# Altium PCB DragonFly.PcbDoc (part 1 of 2)
Units mil, origin at the board's own origin, x right, y up, seen from the top; angles counter-clockwise.
Board outline 2810.81 x 2810.8 mil, 4 copper layers (Top Layer, Mid-Layer 1, Mid-Layer 2, Bottom Layer); 100 components, 58 nets, 317 pads, 146 vias.
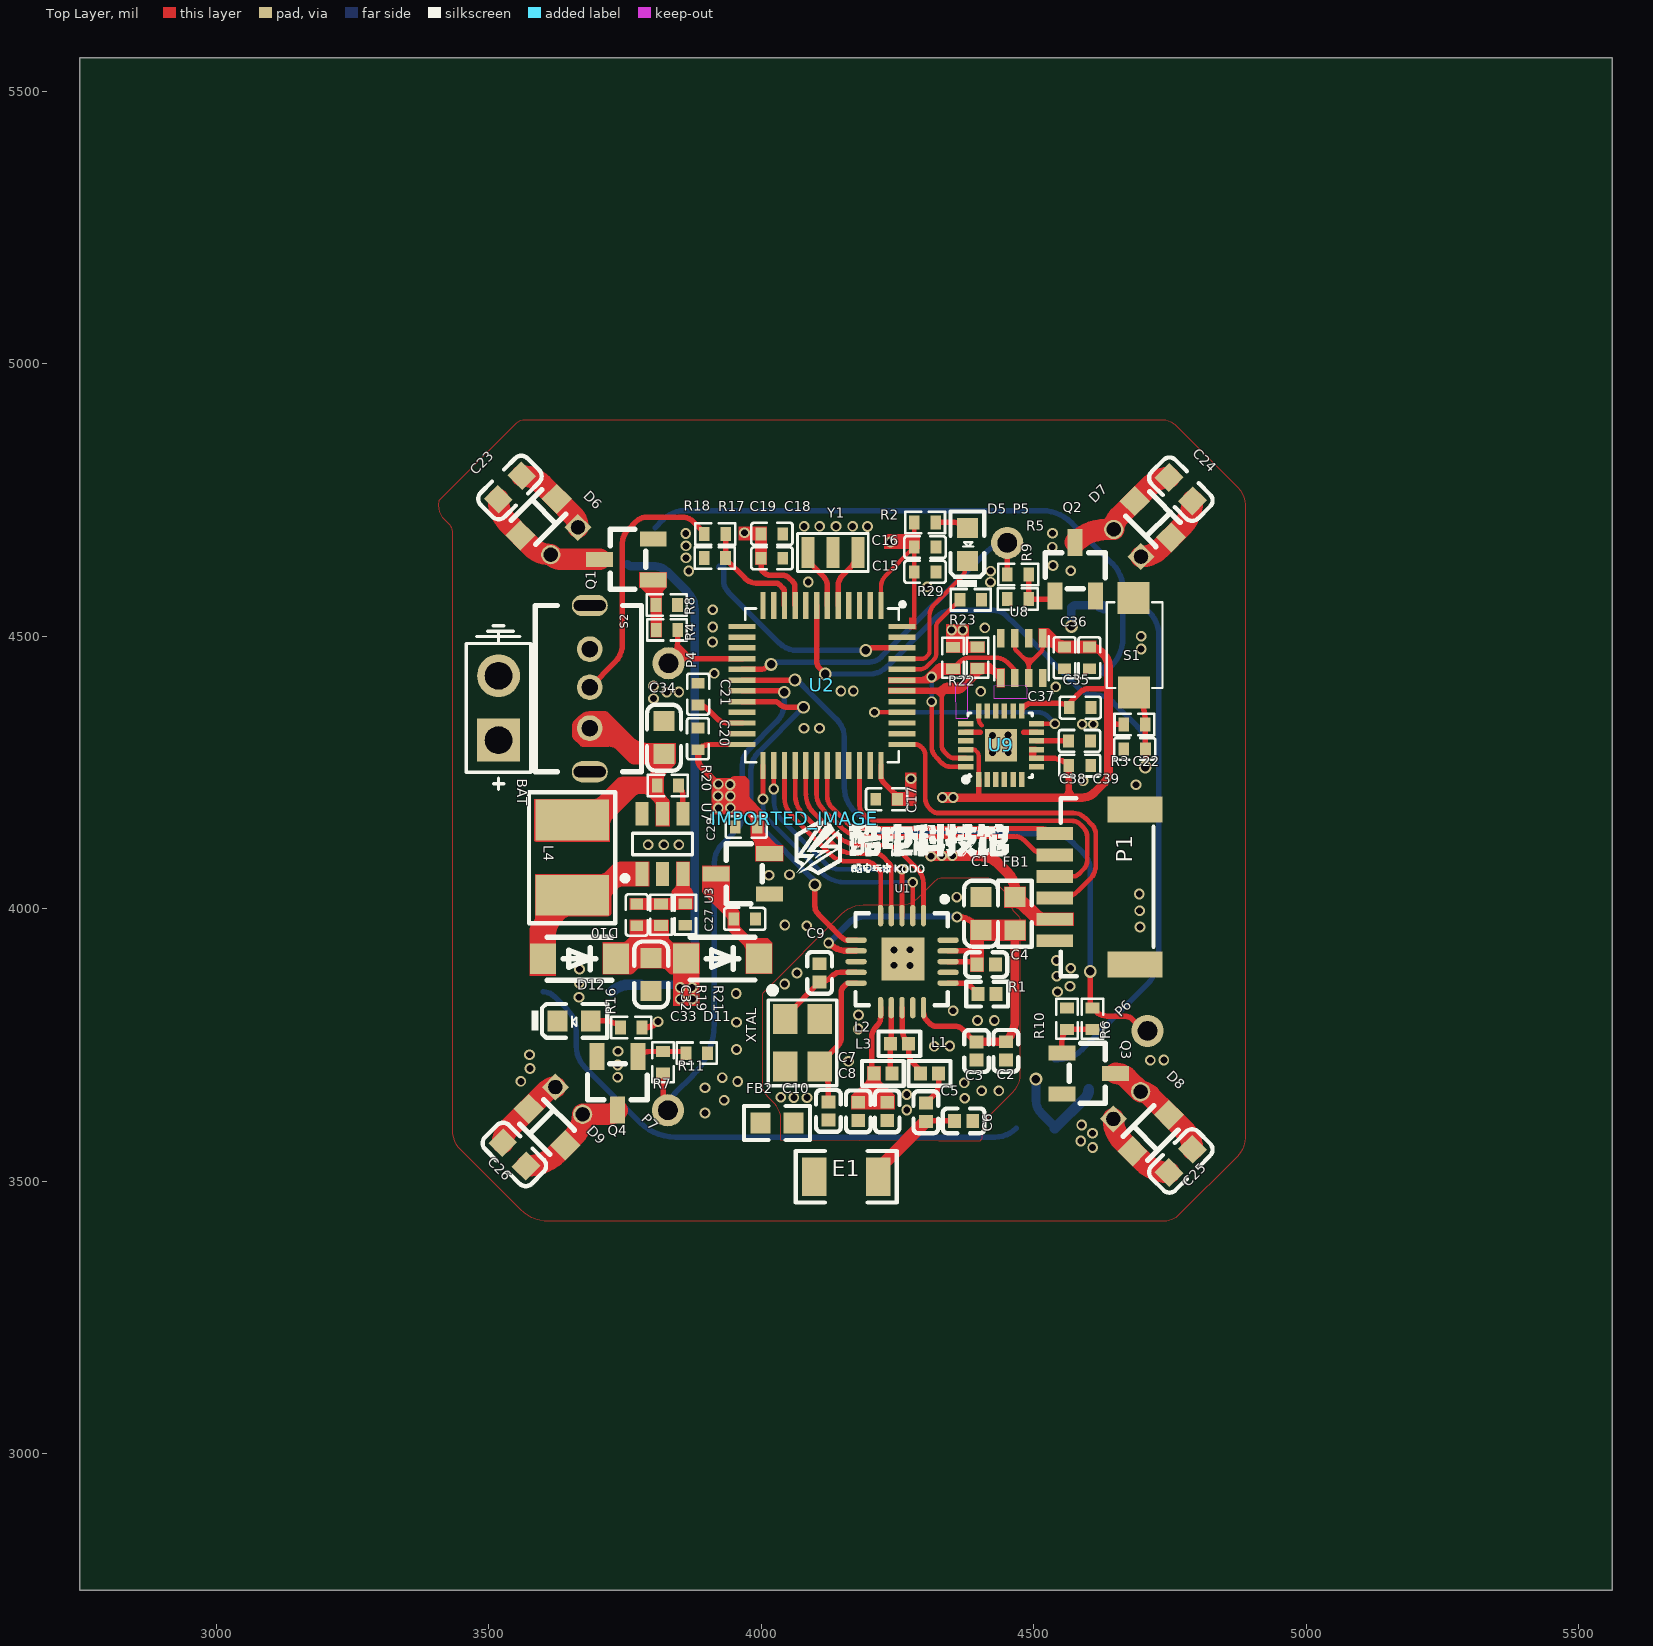
[diagram p0: Top Layer view]
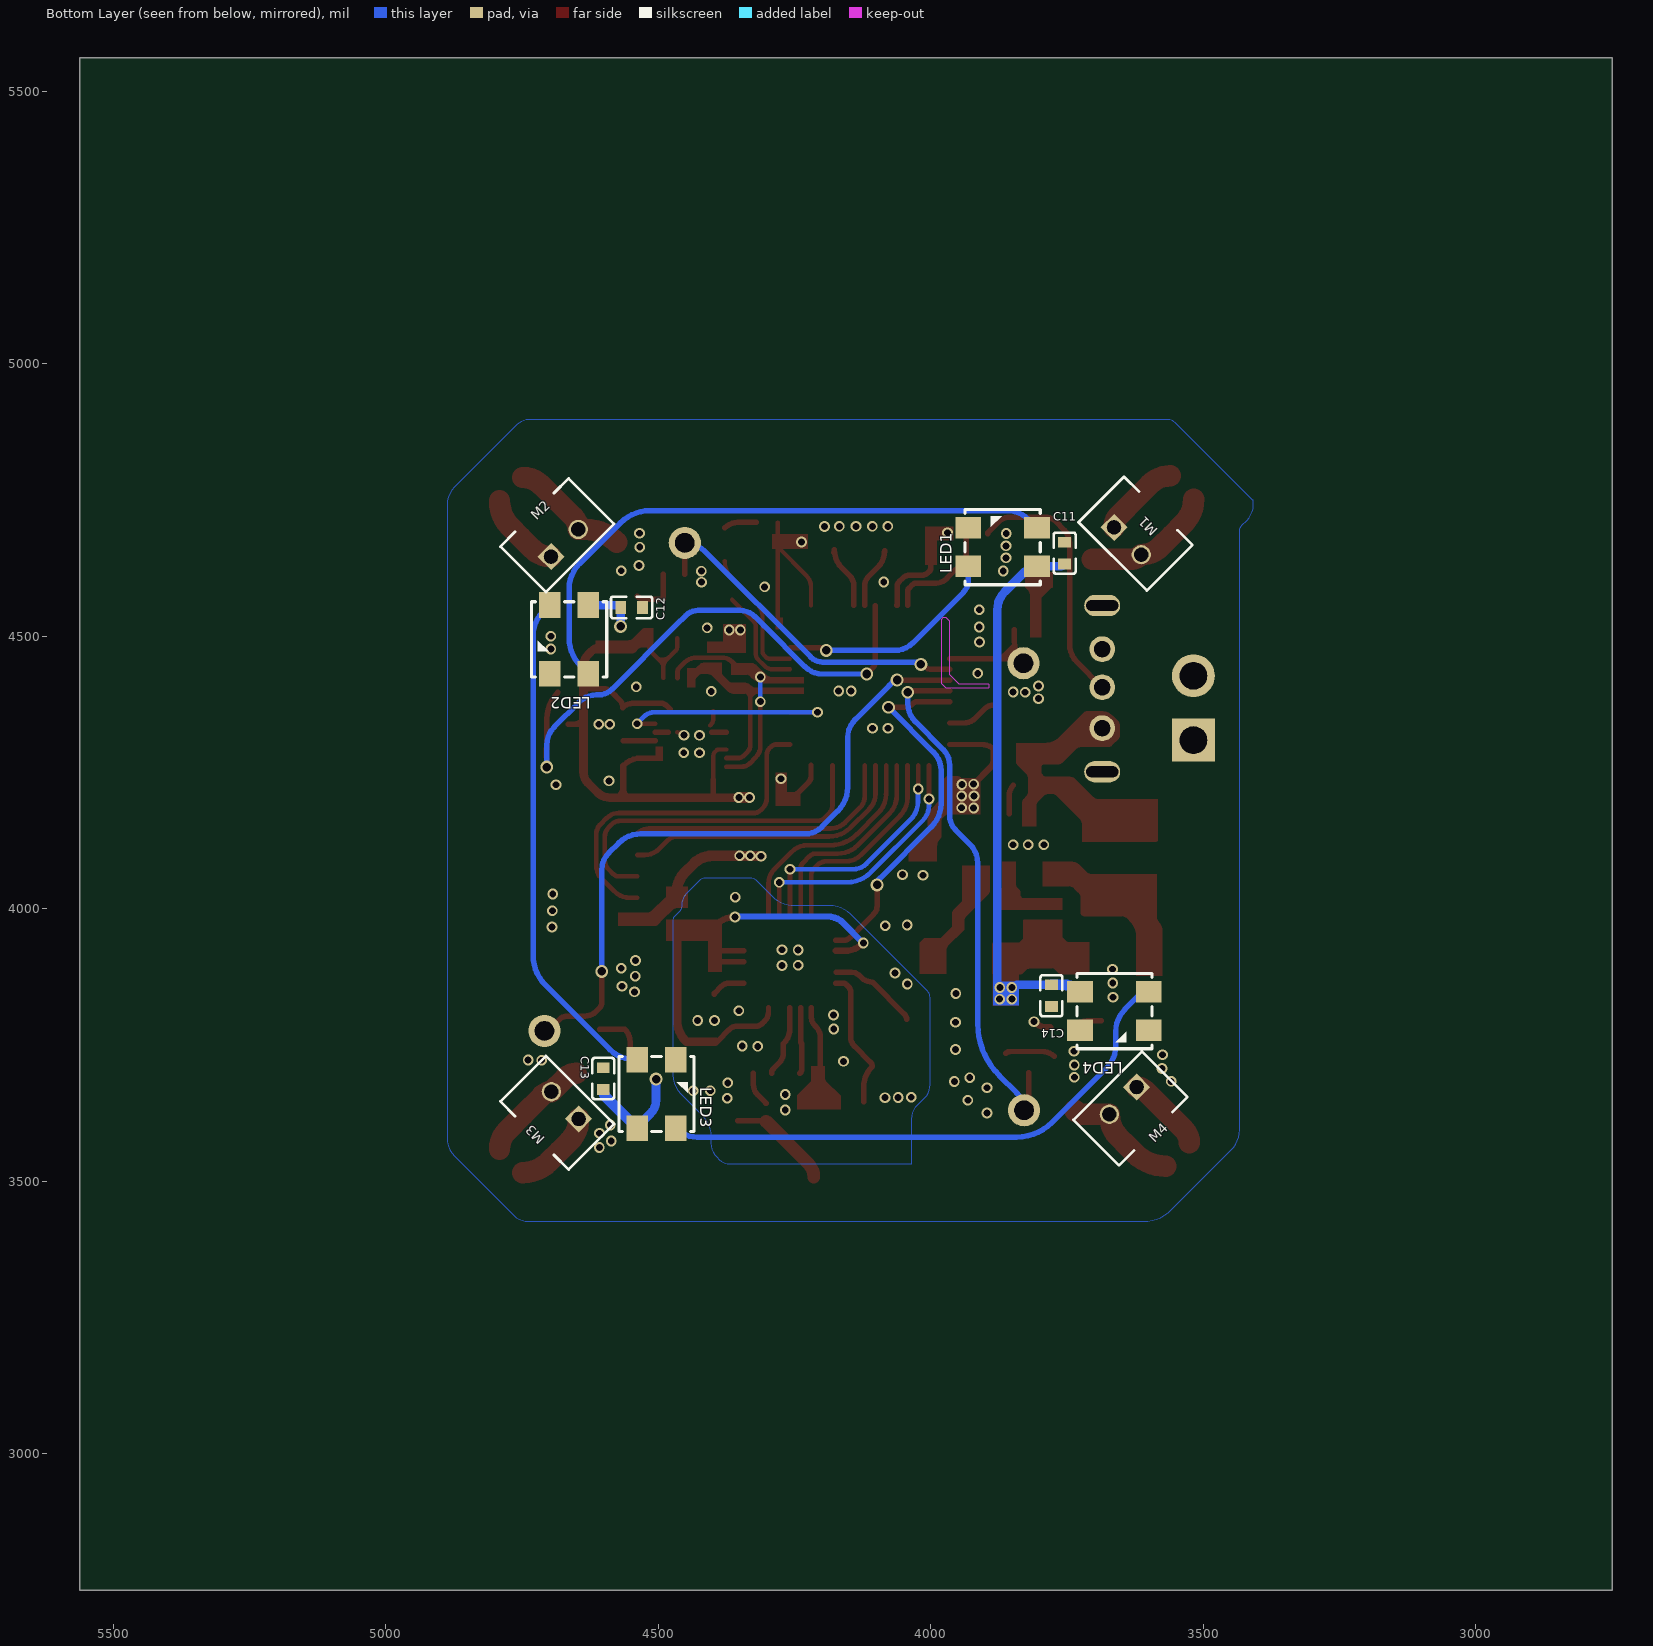
[diagram p1: Bottom Layer view, seen from below]
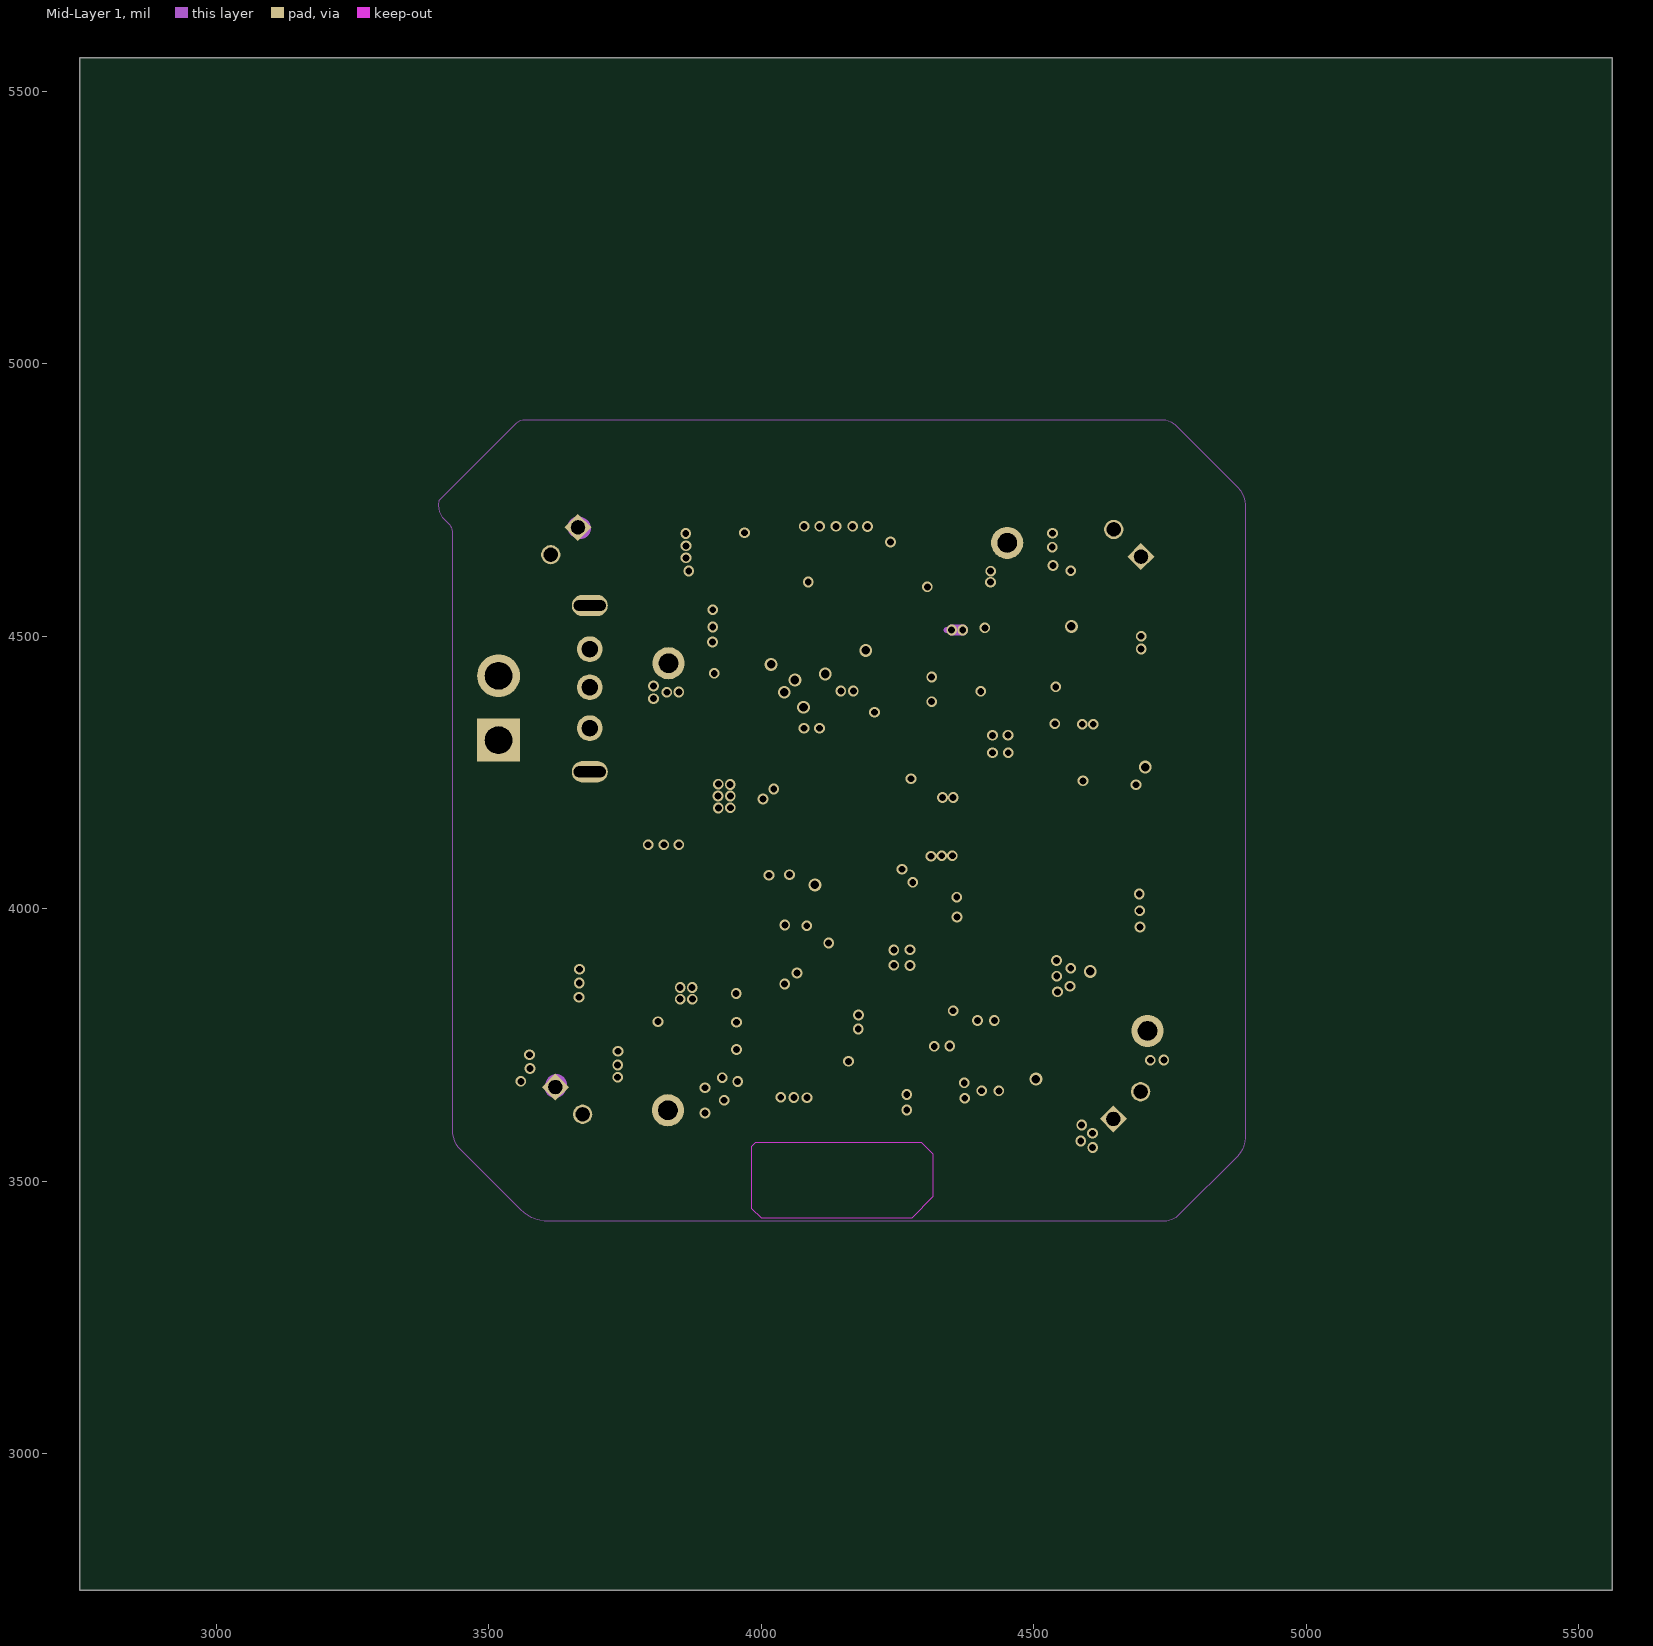
[diagram p2: Mid-Layer 1]
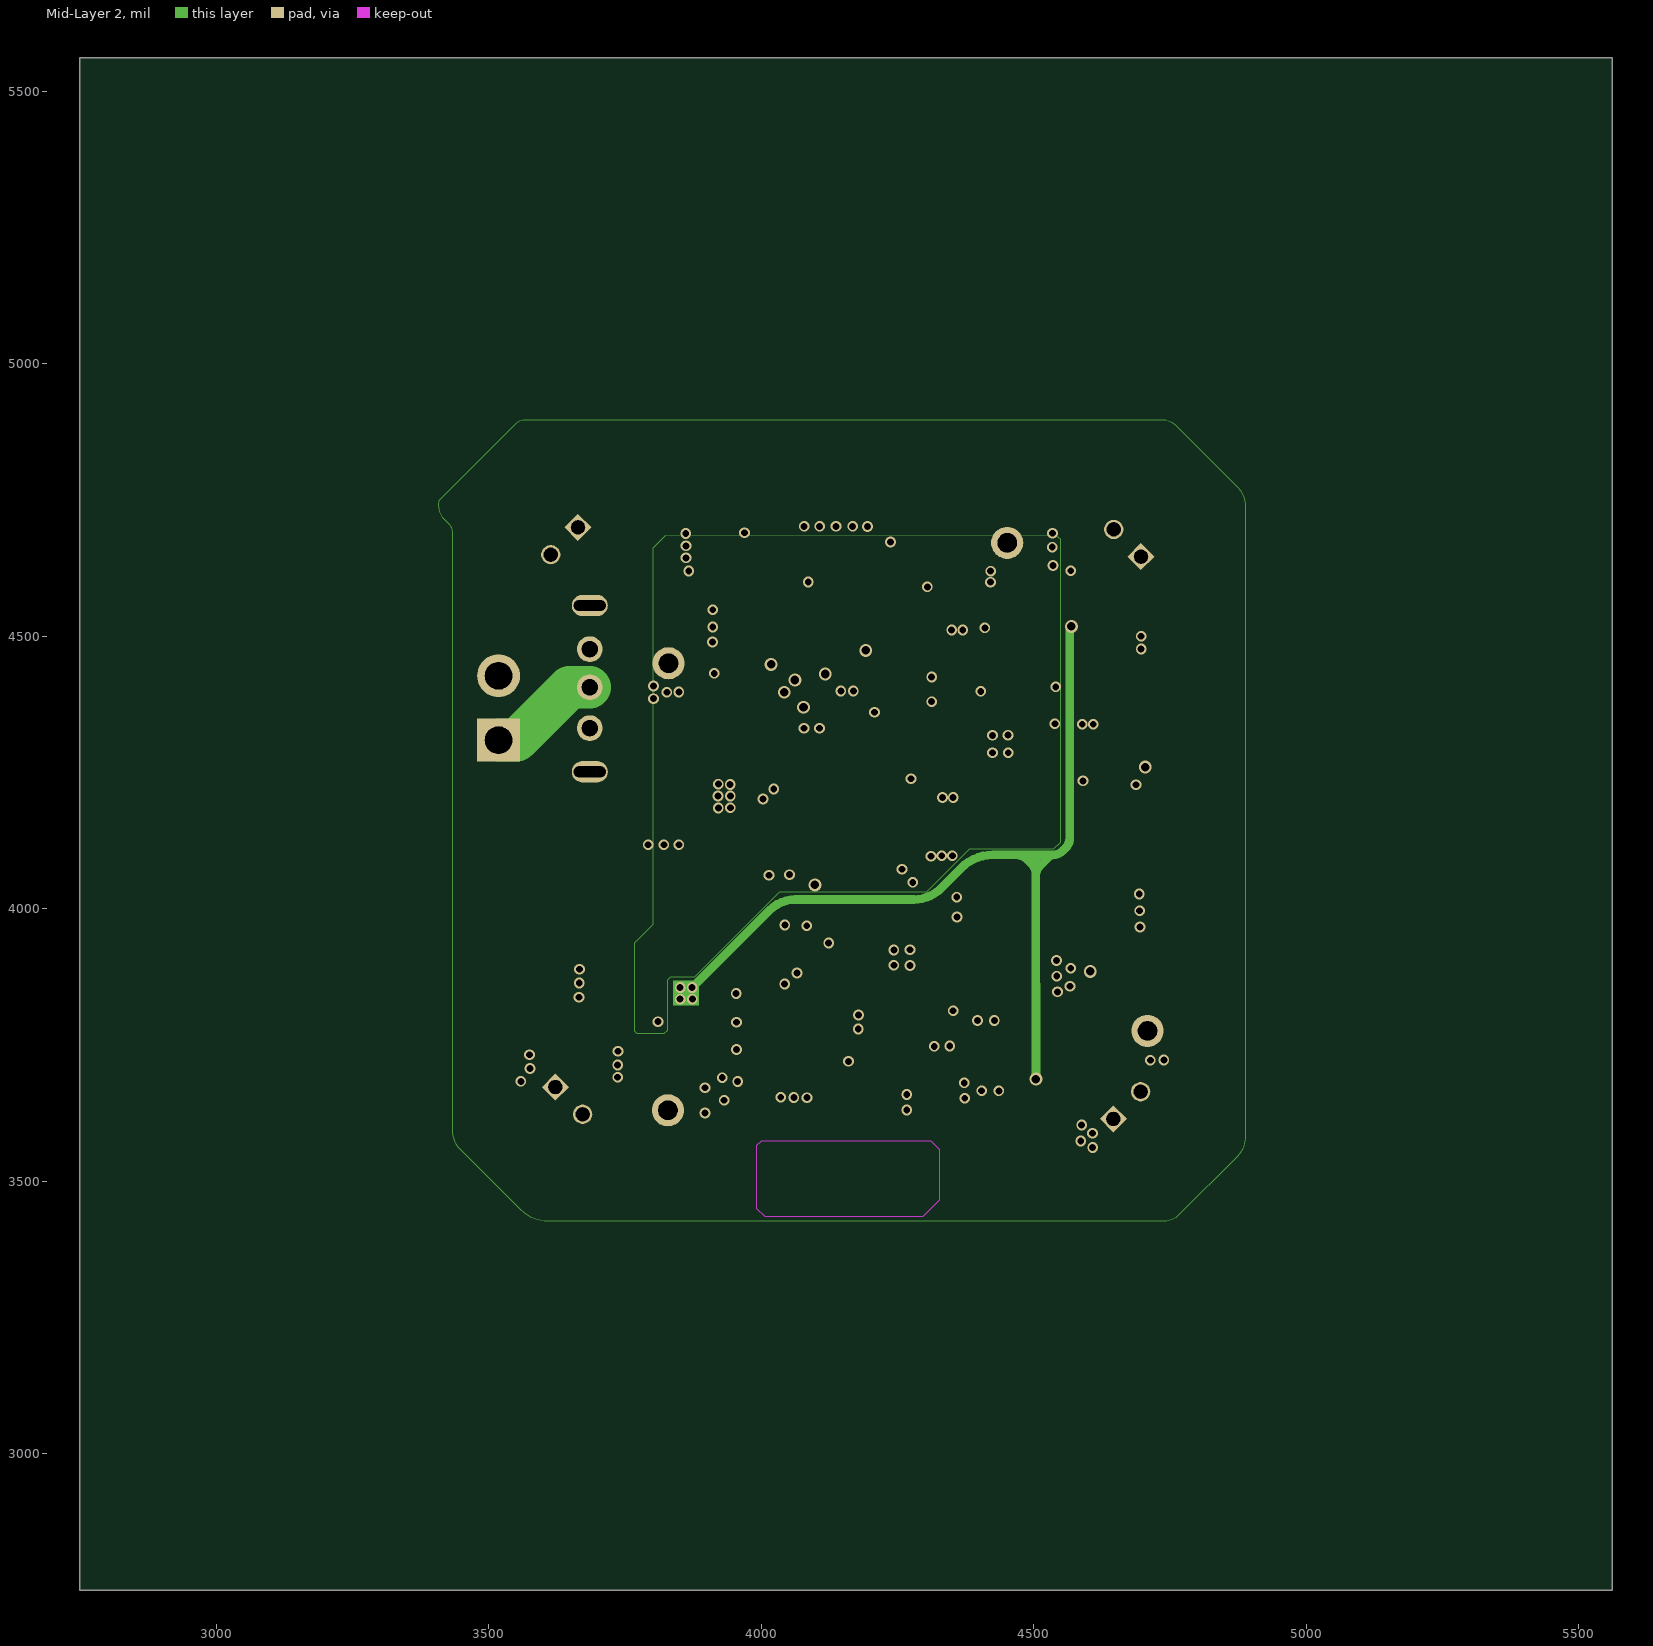
[diagram p3: Mid-Layer 2]

## Layer stack, top to bottom
Top Solder: solder mask 0.4, Solder Resist, Dk 3.5
Top Layer: signal copper 1.4
Dielectric 1: dielectric 12.6, FR-4, Dk 4.8
Mid-Layer 1: signal copper 1.4
Dielectric3: dielectric 12.6, FR-4, Dk 4.8
Mid-Layer 2: signal copper 1.4
Dielectric2: dielectric 12.6, FR-4, Dk 4.8
Bottom Layer: signal copper 1.4
Bottom Solder: solder mask 0.4, Solder Resist, Dk 3.5

## Board outline
5560.81,2750 2750,2750 2750,5560.8 5560.81,5560.8

## Design rules (kind name [scope] priority, off if disabled: settings)
Clearance [All] p1: gap=10 ignorepadtopadclearanceinfootprint=FALSE except(0: Arc-Hole Track-Hole SMDPad-Hole THPad-Hole Via-Hole Fill-Hole Poly-Hole Region-Hole Text-Hole)
PolygonConnect [All] p1: connectstyle=Relief reliefconductorwidth=10 reliefentries=4 polygonreliefangle="90 Angle" airgapwidth=10
RoutingVias [All] p1: holewidth=28 width=50 viastyle="Through Hole" minholewidth=28 minwidth=50 maxholewidth=28 maxwidth=50
SolderMaskExpansion [All] p1: expansion=4 istentingtop=FALSE
Width [All] p1: maxlimit=10 minlimit=10 preferedwidth=10
30 further rules are at their usual default settings.

## Components (designator, comment, footprint, x,y, rotation, side; value= is the part's Value field where it differs from the comment)
BAT "BAT" D-BAT 3518.05,4369.18 r90 top
C1 "22uF" "D-C 0603" 4403.09,3990.83 r90 top
C2 "10nF" "D-C 0402" 4448.68,3739.3 r270 top
C3 "1nF" "D-C 0402" 4394.88,3738.9 r270 top
C4 "33nF" "D-C 0402" 4412.58,3897.5 r0 top
C5 "1.5nF" "D-C 0402" 4301.91,3626.66 r90 top
C6 "1nF" "D-C 0402" 4371.2,3610.91 r180 top
C7 "2.2nF" "D-C 0402" 4231.04,3628.24 r90 top
C8 "4.7pF" "D-C 0402" 4177.89,3628.24 r90 top
C9 "10pF" "D-C 0402" 4107.08,3882.2 r270 top
C10 "10pF" "D-C 0402" 4123.17,3629.02 r90 top
C11 "0.1UF" "C 0402" 3754.27,4652.25 r270 bottom
C12 "0.1UF" "C 0402" 4548.77,4552.6 r0 bottom
C13 "0.1UF" "C 0402" 4600.67,3688.5 r270 bottom
C14 "0.1UF" "C 0402" 3778.68,3840.44 r90 bottom
C15 "0.1uF" "C 0402" 4300.37,4618 r0 top
C16 "0.1uF" "C 0402" 4300.37,4663.3 r0 top
C17 "0.1UF" "C 0402" 4229.87,4200.7 r0 top
C18 "0.1UF" "C 0402" 4019.57,4687.7 r0 top
C19 "1UF" "C 0402" 4019.57,4642.8 r0 top
C20 "0.1uF" "C 0402" 3883.77,4311.7 r270 top
C21 "4.7uF" "C 0402" 3884.17,4393.6 r270 top
C22 "0.1uF" "C 0402" 4684.97,4293.2 r0 top
C23 "10uF" "D-C 0603" 3538.98,4772.7 r45 top
C24 "10uF" "D-C 0603" 4769.58,4769.6 r315 top
C25 "10uF" "D-C 0603" 4769.58,3537.3 r225 top
C26 "10uF" "D-C 0603" 3547.08,3549.2 r135 top
C27 "1uF" "C 0402" 3969.57,3981.4 r0 top
C28 "1uF" "C 0402" 3972.37,4149.9 r180 top
C32 "15pF" "C 0402" 3771.57,3988.5 r90 top
C33 "22uF" "D-C 0603" 3797.98,3879.4 r90 top
C34 "22uF" "D-C 0603" 3821.58,4313.7 r90 top
C35 "0.1uF" "C 0402" 4556.27,4460.1 r90 top
C36 "0.1uF" "C 0402" 4601.87,4460.1 r90 top
C37 "0.1uF" "C 0402" 4584.97,4368.8 r180 top
C38 "10nF" "C 0402" 4584.17,4262.5 r0 top
C39 "0.1uF" "C 0402" 4583.77,4307.8 r180 top
D5 "LED 0603" D-LED-0603 4379.07,4669.18 r270 top
D6 "CUS10S30" SOD-323 3591.47,4718.19 r225 top
D7 "CUS10S30" SOD-323 4718.44,4714.46 r135 top
D8 "CUS10S30" SOD-323 4714.51,3588.47 r45 top
D9 "CUS10S30" SOD-323 3606.86,3599.38 r315 top
D10 "1N5819W" "R-SOD 123" 3666.48,3908.16 r0 top
D11 "1N5819" "R-SOD 123" 3928.68,3908.55 r0 top
D12 "LED 0603" D-LED-0603 3657.82,3793.2 r180 top
E1 "ANT" D-ANT 4155.85,3508.16 r180 top
FB1 "0R" "D-R 0603" 4465.29,3990.83 r270 top
FB2 "0R" "D-R 0603" 4028.87,3606.86 r0 top
IMPORTED_IMAGE "IMPORTED_IMAGE" IMPORTED_IMAGE 4060.99,4164.88 r0 top
L1 "3.9nH" D-L0402 4308.6,3697.92 r0 top
L2 "8.2nH" D-L0402 4253.48,3752.25 r0 top
L3 "2.7nH" D-L0402 4223.17,3697.92 r180 top
L4 "4.7uH,4A" D-L1812-1 3653.09,4093.59 r270 top
LED1 "WS2812B-MINI" "WS2812B- MINI" 3868.03,4663.29 r0 bottom
LED2 "WS2812B-MINI" "WS2812B- MINI" 4663.33,4493.99 r270 bottom
LED3 "WS2812B-MINI" "WS2812B- MINI" 4503.09,3660.13 r90 bottom
LED4 "WS2812B-MINI" "WS2812B- MINI" 3662.93,3812.09 r180 bottom
M1 "Motor 720" D-MOTOR 3638.4,4674.14 r225 bottom
M2 "Motor 720" D-MOTOR 4671.2,4671.15 r135 bottom
M3 "Motor 720" D-MOTOR 4671.2,3639.65 r45 bottom
M4 "Motor 720" D-MOTOR 3647.58,3647.53 r315 bottom
P1 "SH1.0-6P" "CONN-SMD SH1.0-6P" 4612.14,4039.65 r90 top
P4 "PWM1" D-HDR1X1 3829.86,4450.28 r45 top
P5 "PWM2" D-HDR1X1 4451.12,4671.15 r45 top
P6 "PWM3" D-HDR1X1 4708.6,3775.87 r45 top
P7 "PWM4" D-HDR1X1 3828.68,3630.2 r45 top
Q1 "SI2302" SOT-23-3 3752.7,4640.83 r90 top
Q2 "SI2302" SOT-23-3 4575.92,4622.72 r0 top
Q3 "SI2302" SOT-23-3 4600.73,3697.92 r270 top
Q4 "SI2302" SOT-23-3 3736.16,3679.81 r180 top
R1 "22K" "D-R 0402" 4414.18,3843.2 r0 top
R2 "4.7K" "R 0402" 4300.34,4708.49 r0 top
R3 "10K" "R 0402" 4684.54,4338.09 r0 top
R4 "1K" "R 0402" 3827.04,4511.69 r180 top
R5 "1K" "R 0402" 4471.14,4613.29 r0 top
R6 "1K" "R 0402" 4607.34,3798.29 r270 top
R7 "1K" "R 0402" 3819.94,3718.39 r90 top
R8 "10K" "R 0402" 3826.64,4556.99 r180 top
R9 "10K" "R 0402" 4470.74,4567.99 r0 top
R10 "10K" "R 0402" 4560.94,3798.29 r270 top
R11 "10K" "R 0402" 3881.74,3734.89 r180 top
R16 "4.7K" "R 0402" 3761.34,3782.19 r180 top
R17 "100K" "R 0402" 3915.24,4687.69 r0 top
R18 "100K" "R 0402" 3914.84,4643.19 r180 top
R19 "73.2K" "R 0402" 3816.04,3988.89 r90 top
R20 "100K" "R 0402" 3828.64,4226.29 r180 top
R21 "10K" "R 0402" 3860.54,3989.29 r90 top
R22 "4.7K" "R 0402" 4351.84,4460.09 r90 top
R23 "4.7K" "R 0402" 4396.74,4460.49 r90 top
R29 "10K" "R 0402" 4384.14,4566.79 r0 top
S1 "D-SW-PB" "D-SWITCH CEWO" 4684.98,4483.35 r90 top
S2 "SW-SPDT" "D-SWITCH PWR" 3685.37,4556.19 r0 top
U1 "nRF24L01" D-QFN20 4297.58,3987.29 r270 top
U2 "D-STM32F401CCU6" D-QFN48 4113.35,4410.5 r270 top
U3 "XC6206" SOT-23-3 3966.08,4064.06 r90 top
U7 "D-SX1308" D-SOT23-6 3818.84,4118.79 r270 top
U8 "BMP280" "D-LGA-2 5X2MM" 4477.5,4459.73 r270 top
U9 "MPU9250" "QFN-24 P0.40" 4440.13,4299.85 r0 top
XTAL "XTAL16M" "D-SMD-3225 4P" 4075.68,3753.98 r270 top
Y1 "8MHz" D-SMD-CSTSE800G52-R0 4131.44,4653.43 r180 top

## Footprints (in the part's own frame and the unit in brackets; to place one, negate y for a bottom-side part, rotate by r counter-clockwise, add the part's x,y. Pads: shape width x height; smd on the part's side, far side on the other; paste and mask are expansions set on the pad)
"C 0402" [mm]
  rect 0.5x0.6 smd mask+0.102: 1(-0.508,0) 2(0.508,0)
  silkscreen extent -0.96,-0.51 0.96,0.51
"CONN-SMD SH1.0-6P" [mm]
  rect 0.6x1.71 smd mask+0.051: 1(-2.5,1.87) 2(-1.5,1.87) 3(-0.5,1.87) 4(0.5,1.87) 5(1.5,1.87) 6(2.5,1.87)
  rect 1.2x2.55 smd mask+0.051: 7(3.61,-1.87) 8(-3.61,-1.87)
  silkscreen extent -4.16,-2.73 4.14,1.59
D-ANT [mm]
  rect 1.13x1.8 smd mask+0.102: 0(1.49,0) 1(-1.49,0)
  silkscreen extent -2.36,-1.2 2.36,1.2
D-BAT [mm]
  rect 2x2 hole 1.27 slot 1.275 at 0 deg mask+0.102: 1(-1.524,0)
  round 2 hole 1.27 slot 1.275 at 0 deg mask+0.102: 2(1.476,0)
  silkscreen extent -3.81,-1.5 3.81,1.5
"D-C 0402" [mm]
  rect 0.6x0.65 smd mask+0.102: 1(-0.425,0) 2(0.425,0)
  silkscreen extent -0.98,-0.58 0.98,0.58
"D-C 0603" [mm]
  rect 0.93x0.98 smd mask+0.102: 1(-0.77,0) 2(0.77,0)
  silkscreen extent -1.53,-0.79 1.53,0.79
D-HDR1X1 [mm]
  round 1.5 hole 0.9 slot 0.905 at 0 deg mask+0.102: 1(0,0)
D-L0402 [mm]
  rect 0.6x0.65 smd mask+0.102: 1(-0.425,0) 2(0.425,0)
  silkscreen extent -0.98,-0.58 0.98,0.58
D-L1812-1 [mm]
  rect 1.9x3.42 smd mask+0.102: 1(-1.75,0) 2(1.75,0)
  silkscreen extent -3.05,-2.01 3.05,2.01
D-LED-0603 [mm]
  rect 0.93x0.98 smd mask+0.102: 1(-0.745,-0.026) 2(0.795,-0.026)
  silkscreen extent -1.51,-0.82 2,0.76
"D-LGA-2 5X2MM" [mm]
  rect 0.85x0.35 smd mask+0.102: 1(0.925,0.975) 2(0.925,0.325) 3(0.925,-0.325) 4(0.925,-0.975) 5(-0.925,-0.975) 6(-0.925,-0.325) 7(-0.925,0.325) 8(-0.925,0.975)
  silkscreen extent -1.02,-1.27 1.65,1.45
D-MOTOR [mm]
  rect 0.9x0.9 hole 0.65 slot 0.655 at 0 deg mask+0.102: 1(-0.911,0)
  round 0.9 hole 0.65 slot 0.655 at 0 deg mask+0.102: 2(0.886,0)
  silkscreen extent -2.25,-1 2.25,2
D-QFN20 [mm]
  oval 1x0.25 smd mask+0.102: 1(0,0) 2(0,-0.5) 3(0,-1) 4(0,-1.5) 5(0,-2) 11(4.286,-2) 12(4.286,-1.5) 13(4.286,-1) 14(4.286,-0.5) 15(4.286,0)
  oval 0.25x1 smd mask+0.102: 6(1.143,-3.143) 7(1.643,-3.143) 8(2.143,-3.143) 9(2.643,-3.143) 10(3.143,-3.143) 16(3.143,1.143) 17(2.643,1.143) 18(2.143,1.143) 19(1.643,1.143) 20(1.143,1.143)
  silkscreen extent -0.89,-3.17 4.18,1.13
D-QFN48 [mm]
  rect 1.25x0.25 smd mask+0.102: 1(-3.7,2.7) 2(-3.7,2.2) 3(-3.7,1.7) 4(-3.7,1.2) 5(-3.7,0.7) 6(-3.7,0.2) 7(-3.7,-0.3) 8(-3.7,-0.8) 9(-3.7,-1.3) 10(-3.7,-1.8) 11(-3.7,-2.3) 12(-3.7,-2.8) 25(3.75,-2.8) 26(3.75,-2.3) 27(3.75,-1.8) 28(3.75,-1.3) 29(3.75,-0.8) 30(3.75,-0.3) 31(3.75,0.2) 32(3.75,0.7) 33(3.75,1.2) 34(3.75,1.7) 35(3.75,2.2) 36(3.75,2.7)
  rect 0.25x1.25 smd mask+0.102: 13(-2.725,-3.775) 14(-2.225,-3.775) 15(-1.725,-3.775) 16(-1.225,-3.775) 17(-0.725,-3.775) 18(-0.225,-3.775) 19(0.275,-3.775) 20(0.775,-3.775) 21(1.275,-3.775) 22(1.775,-3.775) 23(2.275,-3.775) 24(2.775,-3.775) 37(2.775,3.675) 38(2.275,3.675) 39(1.775,3.675) 40(1.275,3.675) 41(0.775,3.675) 42(0.275,3.675) 43(-0.225,3.675) 44(-0.725,3.675) 45(-1.225,3.675) 46(-1.725,3.675) 47(-2.225,3.675) 48(-2.725,3.675)
  silkscreen extent -3.85,-3.63 3.61,3.8
"D-R 0402" [mm]
  rect 0.6x0.65 smd mask+0.102: 1(-0.425,0) 2(0.425,0)
  silkscreen extent -0.98,-0.58 0.98,0.58
"D-R 0603" [mm]
  rect 0.93x0.98 smd mask+0.102: 1(-0.77,0) 2(0.77,0)
  silkscreen extent -1.53,-0.79 1.53,0.79
"D-SMD-3225 4P" [mm]
  rect 1.4x1.15 smd mask+0.102: 1(-1.1,-0.8) 2(1.1,-0.8) 3(1.1,0.8) 4(-1.1,0.8)
  silkscreen extent -2.6,-1.6 2,1.6
D-SMD-CSTSE800G52-R0 [mm]
  rect 0.6x1.45 smd mask+0.102: 1(-1.168,0) 2(1.168,0) 3(0,0)
  silkscreen extent -1.65,-0.89 1.65,0.89
D-SOT23-6 [mm]
  rect 1.1x0.6 smd mask+0.102: 1(1.4,-0.95) 2(1.4,0) 3(1.4,0.95) 4(-1.4,0.95) 5(-1.4,0) 6(-1.4,-0.95)
  silkscreen extent -0.5,-1.87 1.72,1.4
"D-SWITCH CEWO" [mm]
  rect 1.5x1.5 smd mask+0.102: 1(2.2,0.051) 2(-2.2,0.025)
  silkscreen extent -2,-1.3 2,1.3
"D-SWITCH PWR" [mm]
  round 1.2 hole 0.75 slot 0.755 at 90 deg mask+0.102: 1(0,-2.032) 2(0,-3.81) 3(0,-5.715)
  oval 1.676x1 hole 0.5 slot 1.5 at 0 deg mask+0.102: 4(0,-7.747) 5(0,0)
  silkscreen extent -2.54,-7.75 2.41,0
IMPORTED_IMAGE [mil]
  silkscreen extent 0,-104 393,0
"QFN-24 P0.40" [mil]
  rect 10x27.56 smd mask+4: 1(-41.35,-63.05) 2(-25.55,-62.95) 3(-9.85,-63.05) 4(5.95,-63.05) 5(21.75,-63.05) 6(37.45,-63.05) 13(37.45,63.05) 14(21.75,63.05) 15(5.85,62.95) 16(-9.85,63.05) 17(-25.65,63.05) 18(-41.25,62.95)
  rect 27.56x10 smd mask+4: 7(65.05,-39.35) 8(65.05,-23.65) 9(65.05,-7.85) 10(65.05,7.95) 11(64.95,23.65) 12(64.95,39.45) 19(-65.05,39.45) 20(-65.05,23.75) 21(-65.05,7.95) 22(-65.05,-7.85) 23(-65.05,-23.65) 24(-65.05,-39.35)
  silkscreen extent -69,-67 57,59
"R 0402" [mm]
  rect 0.5x0.65 smd mask+0.102: 1(-0.5,0) 2(0.5,0)
  silkscreen extent -0.93,-0.5 0.93,0.5
"R-SOD 123" [mm]
  rect 1.2x1.4 smd mask+0.102: 1(-1.7,0) 2(1.7,0)
  silkscreen extent -1.5,-1 1.5,1
SOD-323 [mm]
  rect 1x1 smd mask+0.102: 1(-1.2,0) 2(1.2,0)
  silkscreen extent -1,-0.8 1,0.8
SOT-23-3 [mm]
  rect 0.7x1.25 smd mask+0.102: 1(-0.95,-1.25) 2(0.95,-1.25) 3(0,1.25)
  silkscreen extent -1.4,-0.9 1.4,0.76
"WS2812B- MINI" [mm]
  rect 1.2x1 smd mask+0.102: 1(-1.6,0.9) 2(-1.6,-0.9) 3(1.6,-0.9) 4(1.6,0.9)
  silkscreen extent -1.75,-1.75 1.75,1.75

## Free pads (board coordinates)
  rect 78.74x78.74 smd mask+4: 9(4260.17,3907.37)
  rect 59.05x59.05 smd mask+4: 11(4439.7,4299.89)

## Via types
v1: diameter 19.69, hole 12.6, Top Layer to Bottom Layer, 135 vias
v2: diameter 23.62, hole 15.75, Top Layer to Bottom Layer, 11 vias

## Nets (pads, with @x,y where several pads share a name; then routed paths per layer and width w, separated by ;. In a path a pad name is that pad's centre, name@x,y a point inside that pad or via, vN(x,y) a via of type N, cw(c..) or ccw(c..) an arc to the next point about the centre after c; other vN are vias at no path point)
3V3-1: C15.1 C16.1 C17.2 C18.1 C19.1 C20.2 C28.1 C35.2 C36.2 C37.2 C38.1 FB1.1 P1.2 R2.1 R3.1 R16.1 R22.2 R23.2 U2.1 U2.9 U2.24 U2.36 U2.48 U3.2 U8.2 U8.6 U8.8 U9.1 U9.8 U9.9 U9.13 U9.22 | length 2206.6
  Top Layer w7.87: C20.2@3883.77,4291.69 cw(c3881.91,4289.8) C20.2@3884.59,4289.8 ; U2.1@4219.58,4556.2 4219.58,4590.83 ; 4219.63,4590.83 cw(c4247.92,4590.83) 4227.91,4610.84 C16.1@4280.37,4663.3 C15.1@4280.37,4618 4280.38,4528.48 ; C16.1@4280.34,4663.27 ccw(c4279.62,4664) C16.1@4280.64,4664 ; C16.1@4280.68,4663.99 R2.1@4280.68,4708.55 ; U9.22@4384.96,4292.04 4375.04,4292.04 ccw(c4375.1,4292.1) U9.22@4375.08,4292 4388.88,4292.01 cw(c4388.92,4286.31) 4392.95,4290.34 4396,4287.29 cw(c4389.38,4280.67) 4398.75,4280.67 ; U9.1@4398.78,4236.8 4398.78,4280.66 ; U8.6@4464.7,4496.15 4464.7,4481.2 ccw(c4476.13,4481.2) 4468.05,4473.12 4484.92,4456.24 ; 4479.25,4461.92 ccw(c4492.14,4474.81) 4492.14,4456.58 4498.36,4456.58 ; U8.2@4490.3,4423.31 ccw(c4489.85,4423.76) 4490.49,4423.76 4490.48,4442.8 ; 4502.09,4460.3 cw(c4492.29,4470.1) 4492.29,4456.24 4484.92,4456.24 ; U8.8@4515.89,4496.15 cw(c4515.44,4495.7) 4516.08,4495.7 4516.08,4479.02 cw(c4504.67,4479.02) 4512.74,4470.96 4498.36,4456.58 ; 4484.92,4456.24 cw(c4471.48,4442.8) 4490.49,4442.8 ; 4490.49,4442.8 cw(c4504.75,4442.8) 4494.67,4452.88 4498.36,4456.58
  Top Layer w10: C20.2@3883.77,4291.69 cw(c3906.93,4268.56) 3906.93,4301.27 ; 3906.88,4301.27 U2.24@3964.73,4301.25 ; 3999.58,4625.68 C19.1@3999.57,4642.8 ; 3999.63,4625.68 cw(c3999.35,4625.68) 3999.55,4625.48 ccw(c4008.1,4625.48) 4002.05,4619.43 4005.06,4616.42 ccw(c4016.47,4627.83) 4016.47,4611.7 4018.84,4611.7 4037.65,4611.7 cw(c4037.65,4591.54) 4051.91,4605.79 4057.85,4599.85 cw(c4048.44,4590.44) 4061.75,4590.44 ; U2.9@4061.75,4557.14 ccw(c4063.09,4557.14) U2.9@4062.14,4556.19 ; U2.9@4061.78,4557.14 4061.78,4590.44 ; U2.36@4219.62,4262.88 4219.62,4241.36 ccw(c4230.39,4241.36) 4222.78,4233.75 C17.2@4245.68,4210.88 ; C17.2@4245.64,4210.89 cw(c4235.43,4200.68) C17.2@4249.87,4200.7 ; 4398.74,4204.05 ccw(c4399.05,4204.05) 4398.83,4203.83 ; 4398.78,4204.05 U9.1@4398.78,4236.8 ; U9.13@4477.54,4362.94 cw(c4483.21,4362.94) 4479.2,4366.95 4484.58,4372.33 4485.3,4373.04 cw(c4494.03,4364.3) 4494.03,4376.66 4547.58,4376.66 cw(c4547.58,4353.68) 4563.82,4369.93 C37.2@4564.96,4368.8 cw(c4585.12,4368.78) 4570.88,4383.03 4579.07,4391.23 4585.15,4397.31 cw(c4599.94,4382.52) 4599.94,4403.43 4636.9,4403.43 ccw(c4636.9,4403.5) 4636.95,4403.45 ; U9.8@4505.18,4276.2 4530.98,4276.24 cw(c4531,4229.3) C38.1@4564.17,4262.5 ; 4636.95,4335.32 cw(c4643.61,4328.66) 4643.61,4338.08 R3.1@4664.85,4338.09 4658.49,4338.08 cw(c4658.49,4368.55) 4636.95,4347
  Top Layer w11.81: R16.1@3781.03,3782.18 3784.9,3782.17 ccw(c3784.9,3818.47) v1(3810.57,3792.8) ; C20.2@3883.77,4291.69 cw(c3882.86,4290.75) 3884.19,4290.75 3884.18,4274.3 ccw(c3905.34,4274.3) 3890.39,4259.34 v1@3921.28,4228.45 ; 4557.14,4203.83 ccw(c4540.12,4220.85) 4564.19,4220.85 ; C38.1@4564.17,4262.5 4564.18,4220.85 ; 4573.46,4203.83 4569.68,4207.6 cw(c4582.92,4220.85) 4564.19,4220.85
  Top Layer w15.75: v1(4351.91,4203.82) 4588.55,4203.83 ccw(c4588.55,4236.09) 4611.36,4213.27 ; C36.2@4601.87,4480.11 cw(c4601.91,4449.55) 4623.54,4471.17 ; 4611.36,4213.27 4628.6,4230.51 ccw(c4608.43,4250.68) 4636.95,4250.68 4636.95,4335.32 4636.95,4444.96 ccw(c4606.03,4444.96) 4627.89,4466.82 4623.53,4471.18
  Top Layer w19.68: v1(4311.35,4096.34) v1(4350.47,4097.13) 4399.94,4097.13 cw(c4399.94,4047.71) 4434.89,4082.66 4451.12,4066.43 ; v1(4332.22,4203.82) v1(4351.91,4203.82) ; 4451.12,4066.43 cw(c4416.91,4032.21) 4465.29,4032.21 FB1.1@4465.3,4021.15
  Mid-Layer 1 w11.81: v1@4340.06,4511.31 v1(4349.15,4511.3)
  Mid-Layer 1 w19.68: v1(4349.15,4511.3) v1(4369.62,4511.3)
  other v1: 4331.04,4097.13 3921.2,4184.93 3943.25,4185.32 3920.8,4206.58 3943.24,4206.58 3921.28,4228.45 3942.85,4227.84 4274.81,4238.4 4236.95,4672.72 3969.23,4689.65
5V: C11.2 C12.2 C13.2 C14.2 C32.1 C33.2 D10.2 D11.1 LED1.1 LED2.1 LED3.1 LED4.1 R19.1 | length 2997.8
  Mid-Layer 2 w15.75: v1(3873.17,3855.4) 4014.83,3997.06 cw(c4062.54,3949.35) 4062.54,4016.82 4279.49,4016.82 ccw(c4279.49,4088.06) 4329.86,4037.69 4367.22,4075.05 cw(c4424.35,4017.92) 4424.35,4098.71 4535.03,4098.71 ; 4468.64,4098.71 cw(c4468.64,4073.52) 4486.45,4091.33 4496.4,4081.39 cw(c4478.35,4063.33) 4503.87,4063.33 cw(c4522.73,4063.33) 4509.4,4076.67 4514.51,4081.78 4528.89,4096.17 cw(c4535.03,4090.03) 4535.03,4098.71 ; v2(4503.87,3687.29) 4503.87,4040.47 4503.87,4098.59 cw(c4504.04,4098.59) 4503.92,4098.71 ; v2(4568.83,4518) ccw(c4576.43,4510.41) 4565.69,4510.41 4565.69,4129.42 cw(c4540.02,4129.42) 4558.17,4111.27 4553.09,4106.19 cw(c4535.03,4124.25) 4535.03,4098.71
  Bottom Layer w15.75: C11.2@3754.27,4632.24 ccw(c3764.87,4642.84) C11.2@3764.87,4627.85 ; C11.2@3764.88,4627.85 LED1.1@3805.08,4627.85 ; C14.2@3778.68,3860.45 3838.88,3860.45 ; LED1.1@3805.04,4627.85 cw(c3805.04,4597.53) 3826.48,4618.97 3864.08,4581.37 cw(c3830.74,4548.03) 3877.89,4548.03 3877.89,4439.26 3877.89,3866.81 cw(c3861.76,3866.81) v1(3873.17,3855.4) ; 3838.96,3860.44 cw(c3838.96,3843.24) v1(3851.12,3855.4) ; v2(4503.87,3687.29) 4503.88,3648.45 ccw(c4537.48,3648.45) 4513.72,3624.69 LED3.1@4536.58,3601.84 ; LED3.1@4536.57,3601.84 cw(c4531.86,3597.13) LED3.1@4538.52,3597.14 ; C12.2@4568.78,4552.6 cw(c4579.34,4542.04) 4579.33,4556.98 ; C12.2@4568.78,4552.6 cw(c4568.57,4552.46) C12.2@4568.84,4552.46 ; v2@4568.88,4518 C12.2@4568.88,4552.46 ; 4579.38,4556.98 LED2.1@4627.9,4556.98 ; LED2.1@4619.33,4552.65 cw(c4619.33,4540.54) LED2.1@4627.89,4549.1
  Bottom Layer w19.68: LED4.1@3725.92,3847.53 cw(c3757.12,3816.34) 3757.12,3860.45 C14.2@3778.68,3860.45 ; LED3.1@4538.52,3597.14 4594.18,3652.77 ; 4594.16,3652.77 ccw(c4578.45,3668.49) C13.2@4600.67,3668.49
  other v1: 3851.12,3834.14 3873.56,3834.14
BOOT0: R29.1 U2.44 | length 193.6
  Top Layer w7.87: U2.44@4257.98,4439.06 4289.38,4439.06 ; 4289.37,4439.06 ccw(c4289.37,4461.24) 4305.06,4445.56 4317.47,4457.97 ccw(c4309.4,4466.03) 4320.81,4466.03 4320.81,4517.26 cw(c4334.96,4517.26) 4324.95,4527.27 ; 4324.98,4527.27 R29.1@4364.45,4566.79
C5_1: C5.1 C6.2 E1.1 | length 189.3
  Top Layer w10: C5.1@4301.91,3609.93 cw(c4304.28,3607.56) 4304.28,3610.91 C6.2@4354.47,3610.91
  Top Layer w23.62: E1.1@4214.5,3508.16 cw(c4249.19,3508.16) E1.1@4224.66,3532.69 ; E1.1@4224.68,3532.68 C5.1@4301.91,3609.93
C5_2: C5.2 L1.2 | length 63.3
  Top Layer w10: C5.2@4301.91,3643.39 ccw(c4301.91,3643.86) C5.2@4302.24,3643.53 ; C5.2@4302.28,3643.53 4318.08,3659.34 ; 4318.05,3659.34 ccw(c4300.47,3676.92) 4325.33,3676.92 ; 4325.28,3676.92 L1.2@4325.33,3697.92
C7_2: C7.2 C8.2 L3.2 U1.11 | length 126.5
  Top Layer w10: L3.2@4206.44,3697.92 cw(c4216.43,3707.91) 4202.3,3707.91 4202.28,3763.67 cw(c4230.82,3763.67) 4210.65,3783.83 4212.93,3786.11 ccw(c4198.69,3800.36) 4218.83,3800.36 U1.11@4218.83,3818.55
C9_2: C9.2 U1.9 XTAL.1 | length 165.6
  Top Layer w10: XTAL.1@4044.18,3797.29 cw(c4057,3797.29) XTAL.1@4047.94,3806.36 ; XTAL.1@4047.98,3806.35 4106.98,3865.44 ccw(c4107.02,3893.49) 4126.86,3873.66 4129.86,3876.66 cw(c4145.72,3860.8) 4145.72,3883.23 U1.9@4173.83,3883.23
C10_2: C10.2 U1.10 XTAL.3 | length 257
  Top Layer w10: XTAL.3@4110.25,3718.07 ccw(c4117.65,3710.67) XTAL.3@4107.18,3710.67 cw(c4068.59,3672.08) 4123.17,3672.08 ; XTAL.3@4110.28,3718.07 4140.08,3747.92 ccw(c4123.94,3764.08) 4146.79,3764.08 4146.79,3847.92 cw(c4159.15,3847.92) 4150.41,3856.66 4154.68,3860.91 ; C10.2@4123.17,3645.75 4123.18,3672.08 ; 4154.66,3860.91 cw(c4161.03,3854.54) 4161.03,3863.55 U1.10@4173.83,3863.55
C24_1: C24.1 D7.2 M2.2 Q2.3 | length 222.6
  Top Layer w39.37: Q2.3@4575.92,4671.92 cw(c4633.57,4614.27) 4633.57,4695.8 M2.2@4646.54,4695.8 cw(c4679.3,4695.8) 4656.14,4718.97 ; 4656.18,4718.97 D7.2@4685.03,4747.86 4714.08,4776.86 ; 4714.03,4776.86 cw(c4748.19,4742.7) C24.1@4748.15,4791.03
C25_1: C25.1 D8.2 M3.2 Q3.3 | length 206.1
  Top Layer w39.37: Q3.3@4649.93,3697.92 cw(c4649.93,3668.2) Q3.3@4670.95,3689.22 ; Q3.3@4670.98,3689.22 M3.2@4695.85,3664.31 ; M3.2@4695.85,3664.31 cw(c4695.85,3641.06) 4712.29,3657.5 D8.2@4747.91,3621.88 4776.88,3592.88 cw(c4742.75,3558.72) C25.1@4791.06,3558.72
C26_1: C26.1 D9.2 M4.2 Q4.3 | length 217.7
  Top Layer w39.37: C26.1@3568.52,3527.74 ccw(c3568.52,3608.64) 3625.73,3551.44 ; 3625.68,3551.43 D9.2@3640.27,3565.97 3654.58,3580.32 ccw(c3612.07,3622.86) M4.2@3672.23,3622.87 3717.45,3622.86 ccw(c3717.45,3649.32) Q4.3@3736.16,3630.61
C32_2: C32.2 R19.2 R21.2 U7.3
C39_2: C39.2 U9.10 | length 58.6
  Top Layer w10: U9.10@4505.18,4307.8 4563.58,4307.84 cw(c4563.6,4307.57) C39.2@4563.76,4307.8
D5_1: D5.1 R2.2 | length 60.7
  Top Layer w10: R2.2@4319.98,4708.55 4353.78,4708.55 cw(c4353.81,4674.24) D5.1@4378.07,4698.5
D6_2: C23.1 D6.2 M1.2 Q1.3 | length 240.8
  Top Layer w39.37: C23.1@3517.51,4751.25 ccw(c3580.07,4751.25) 3535.83,4707.02 ; 3535.88,4707.02 D6.2@3558.06,4684.79 3578.98,4663.88 ; 3578.97,4663.88 ccw(c3613.74,4698.66) M1.2@3613.74,4649.48 ccw(c3634.63,4670.36) 3634.63,4640.83 ; 3634.58,4640.83 Q1.3@3703.5,4640.83
D10_1: D10.1 L4.2 U7.1
D11_2: C27.1 D11.2 U3.3
D12_1: D12.1 R16.2 | length 57.7
  Top Layer w10: D12.1@3687.18,3794.2 3712.58,3794.2 ; 3712.63,3794.2 cw(c3712.63,3753.13) R16.2@3741.66,3782.18
DBG-RX: P1.6 U2.31 | length 505.2
  Top Layer w8.66: U2.31@4121.22,4262.86 4121.18,4205.69 ccw(c4149.44,4205.69) 4129.47,4185.72 4156.92,4158.27 ccw(c4183.8,4185.15) 4183.8,4147.13 P1.6@4516.68,4147.13 ; P1.6@4516.67,4147.13 cw(c4516.67,4116.23) P1.6@4538.52,4138.08
DBG-TX: P1.5 U2.30 | length 538.5
  Top Layer w8.66: U2.30@4101.54,4262.86 4101.48,4209.41 ccw(c4137.81,4209.41) 4112.14,4183.75 4147.18,4148.71 ccw(c4186.16,4187.69) 4186.16,4132.57 4465.12,4132.57 cw(c4465.12,4108.37) 4482.22,4125.48 4497.97,4109.73 ccw(c4524.57,4136.33) 4524.57,4098.71 P1.5@4538.52,4098.71
GND: BAT.2 C11.1 C12.1 C13.1 C14.1 C15.2 C16.2 C17.1 C18.2 C19.2 C20.1 C21.1 C22.1 C27.2 C28.2 C33.1 C34.2 C35.1 C36.1 C37.1 C38.2 C39.1 D12.2 FB2.1 LED1.3 LED2.3 LED3.3 LED4.3 P1.1 pad.11 Q1.2 Q2.2 Q3.2 Q4.2 R8.1 R9.1 R10.1 R11.1 R18.2 R21.1 R29.2 S1.1 U2.8 U2.23 U2.35 U2.47 U3.1 U7.2 U8.1 U8.5 U8.7 U9.11 U9.18 U9.20 Y1.3 | length 96.1
  Top Layer w7.87: U9.20@4375.04,4323.64 ccw(c4375.36,4323.95) U9.20@4375.36,4323.51 ; U9.18@4398.85,4362.84 4398.85,4349.2 ccw(c4417.36,4349.2) 4404.27,4336.11 ; pad.11@4420.99,4319.39 ccw(c4424.35,4322.75) pad.11@4424.35,4318 ; v1(4452.69,4318.39) cw(c4465.12,4305.97) pad.11@4465.12,4323.54
  Top Layer w10: U9.20@4375.08,4323.6 4401.28,4323.6 ; 4481.28,4323.5 U9.11@4505.08,4323.5
  other v1: 4607.81,3562.09 4586.16,3573.9 4607.42,3588.08 4587.73,3603.43 3896.79,3625.09 3931.83,3648.71 3896.79,3671.54 3558.99,3683.35 3956.63,3682.96 3928.28,3690.05 3736.55,3690.83 3575.92,3706.98 3736.55,3713.27 4713.72,3721.94 4738.52,3722.33 3574.74,3732.17 3737.34,3738.47 3954.66,3741.62 3954.66,3791.62 3665.69,3837.68 3953.88,3844.38 4543.24,3847.53 4566.47,3857.76 3666.08,3863.67 4542.06,3876.27 3666.47,3888.86 4567.65,3890.83 4541.67,3905.01 4694.82,3966.42 4083.4,3968.79 4043.25,3969.97 4694.03,3996.34 4693.24,4027.05 4014.11,4061.31 4051.91,4062.49 3792.46,4117.21 3821.2,4117.21 3848.76,4117.21 4687.34,4227.45 4590.09,4234.53 4424.35,4286.11 4453.09,4286.11 4424.35,4318 4078.28,4330.99 4106.63,4330.99 4588.91,4338.47 4608.99,4338.47 3802.3,4385.32 3826.71,4397.13 3848.76,4397.53 4146,4399.49 4168.84,4399.49 4402.69,4398.71 4540.09,4406.97 3802.3,4408.55 3913.72,4431.78 4696.79,4476.26 3910.57,4489.26 4696.79,4499.89 4410.17,4515.24 3910.96,4516.82 3910.96,4548.32 4304.66,4590.44 4086.16,4599.49 4420.41,4599.1 4420.8,4619.18 3866.87,4619.57 4567.65,4619.97 4534.98,4629.81 3861.75,4643.59 4533.8,4663.27 3861.75,4665.63 3861.36,4688.47 4534.19,4688.86 4078.68,4701.46 4107.02,4701.46 4136.95,4701.46 4167.65,4701.46 4194.82,4701.07
I2C1-SCL: R23.1 U2.42 U8.4 U9.23 | length 149.5
  Top Layer w8.66: 4331.04,4392.8 4331.04,4300.2 ccw(c4349.86,4300.2) 4336.55,4286.9 4341.9,4281.56 ccw(c4354.66,4294.32) 4354.66,4276.27 ; 4354.68,4276.27 U9.23@4374.98,4276.27 ; U9.23@4374.97,4276.27 cw(c4374.97,4276.16) U9.23@4375.05,4276.23
I2C1-SDA: R22.1 U2.43 U8.3 U9.24 | length 352.3
  Top Layer w8.66: v1(4312.54,4379.81) 4312.54,4298.36 ccw(c4342.11,4298.36) 4321.2,4277.45 4332.28,4266.36 ccw(c4346.4,4280.48) 4346.4,4260.52 U9.24@4374.98,4260.52 ; R22.1@4351.88,4440.44 4364.18,4452.72 cw(c4383.01,4433.9) 4383.01,4460.52 4430.21,4460.52 cw(c4430.21,4430.95) 4451.12,4451.86 4461.36,4441.62 cw(c4453.29,4433.55) 4464.7,4433.55 U8.3@4464.7,4423.31
  Bottom Layer w8.66: v1(4312.54,4379.81) v1(4312.54,4425.08)
L1_1: L1.1 L2.2 U1.13 | length 131
  Top Layer w10: U1.13@4258.2,3818.55 4258.18,3781.26 ccw(c4299.22,3781.26) L2.2@4270.22,3752.25 4270.18,3736.3 ccw(c4297.77,3736.3) 4278.29,3716.82 4288.08,3706.99 cw(c4279.05,3697.92) L1.1@4291.87,3697.92
L2_1: L2.1 L3.1 U1.12 | length 121.9
  Top Layer w10: L3.1@4236.76,3705.51 ccw(c4247.49,3705.51) L3.1@4239.9,3697.92 ; L2.1@4236.76,3752.25 ccw(c4232.52,3756.49) 4238.51,3756.49 U1.12@4238.51,3818.55 ; L3.1@4236.78,3705.51 L2.1@4236.76,3752.25
LED1_2: LED1.2 LED2.4 | length 1112.1
  Bottom Layer w10: LED1.2@3805.04,4698.72 3820.08,4713.76 cw(c3859.78,4674.05) 3859.78,4730.2 4515.05,4730.2 cw(c4515.05,4653.59) 4569.23,4707.76 4644.39,4632.6 cw(c4598.69,4586.9) 4663.32,4586.9 4663.32,4496.21 cw(c4591.4,4496.21) 4642.26,4445.36 LED2.4@4627.9,4431 ; LED2.4@4627.89,4438.87 cw(c4636.43,4438.87) LED2.4@4630.39,4444.91
LED2_2: LED2.2 LED3.4 | length 935.4
  Bottom Layer w10: LED3.4@4538.52,3723.12 4543.98,3723.12 ccw(c4543.98,3786.06) 4588.48,3741.55 4706.58,3859.73 ; LED2.2@4698.77,4556.98 4711.92,4543.82 cw(c4669.56,4501.46) 4729.47,4501.46 4729.47,3914.86 cw(c4651.5,3914.86) 4706.63,3859.73
LED3_2: LED3.2 LED4.4 | length 1015.6
  Bottom Layer w10: LED4.4@3599.94,3847.53 cw(c3599.94,3819.97) LED4.4@3619.43,3839.46 ; LED4.4@3619.38,3839.46 3644.08,3814.85 ; 3644.04,3814.85 cw(c3604.12,3774.93) 3660.57,3774.93 3660.57,3748.32 ccw(c3717.6,3748.32) 3677.27,3707.99 3777.11,3608.16 ccw(c3842.69,3673.74) 3842.69,3580.99 4418.08,3580.99 4428.68,3580.99 ccw(c4428.68,3636.11) LED3.2@4467.65,3597.14
MPU-INT: U2.40 U9.12 | length 423
  Top Layer w8.66: v1(4207.48,4360.31) U2.40@4258.04,4360.3 ; U9.12@4505.08,4339.3 v1@4538.38,4339.33 ; v1@4538.34,4339.33 cw(c4538.34,4339.08) v1(4538.52,4339.26)
  Bottom Layer w8.66: v1(4207.48,4360.31) 4507.41,4360.31 cw(c4507.41,4334.13) 4525.92,4352.64 4537.97,4340.6 cw(c4536.62,4339.26) v1(4538.52,4339.26)
NRF-CE: U1.1 U2.29 | length 407.7
  Top Layer w8.66: 4081.78,4210.1 U2.29@4081.78,4262.87 ; 4081.83,4210.1 ccw(c4130.23,4210.1) 4096,4175.87 4134.85,4137.03 ccw(c4184.59,4186.76) 4184.59,4116.43 ; 4184.59,4116.43 4226.15,4116.43 cw(c4226.15,4076.1) 4254.66,4104.61 4286.72,4072.56 cw(c4260.51,4046.35) 4297.58,4046.35 U1.1@4297.57,3987.29
NRF-CSN: U1.2 U2.25 | length 472.7
  Top Layer w8.66: v1(4003.09,4201.46) U2.25@4003.11,4262.86 ; U1.2@4277.88,3987.29 v1(4277.89,4048.31)
  Bottom Layer w8.66: v1(4003.09,4201.46) 4003.09,4190.05 ccw(c4043.01,4190.05) 4014.78,4161.82 4110.57,4066.03 ccw(c4153.34,4108.8) 4153.34,4048.31 v1(4277.89,4048.31)
NRF-IRQ: U1.6 U2.20 | length 668.4
  Top Layer w10: U2.20@3964.73,4379.99 4022.88,4380.01 ; 4022.86,4380.01 cw(c4022.86,4364.54) 4033.8,4375.48 ccw(c4048.05,4389.73) 4048.06,4369.57 v2(4077.5,4369.57) ; v2(4098.36,4043.59) 4098.37,4004.61 ccw(c4118.33,4004.61) 4104.21,3990.5 4130.97,3963.75 4147.18,3947.53 ccw(c4159.82,3960.17) 4159.82,3942.29 U1.6@4173.83,3942.29
  Bottom Layer w10: v2(4077.5,4369.57) 3994.68,4286.76 ccw(c4027.62,4253.83) 3981.04,4253.83 3981.04,4192.5 ccw(c4040.19,4192.5) 3998.37,4150.68 4093.36,4055.69 cw(c4081.26,4043.59) v2(4098.36,4043.59)
NRF-MISO: U1.5 U2.27 | length 379.4
  Top Layer w8.66: 4042.46,4203.64 ccw(c4089.52,4203.64) 4056.24,4170.36 4128.57,4098.03 ccw(c4155.45,4124.91) 4155.45,4086.9 4191.82,4086.9 cw(c4191.82,4065.39) 4207.03,4080.6 4214.5,4073.13 cw(c4203.07,4061.7) 4219.23,4061.7 ; 4042.48,4203.64 U2.27@4042.48,4262.86 ; U1.5@4218.83,3987.29 ccw(c4217.88,3988.25) U1.5@4219.23,3988.25 ; U1.5@4219.18,3988.25 4219.18,4061.7
NRF-MOSI: U1.4 U2.28 | length 383.1
  Top Layer w8.66: 4062.15,4208.12 ccw(c4110.53,4208.12) 4076.32,4173.9 4134.12,4116.1 ccw(c4170.41,4152.4) 4170.41,4101.07 4210.28,4101.07 cw(c4210.28,4083.26) 4222.87,4095.85 4234.19,4084.53 cw(c4223.76,4074.1) 4238.51,4074.1 U1.4@4238.51,3987.29 ; 4062.18,4208.12 U2.28@4062.17,4262.86
NRF-SCK: U1.3 U2.26 | length 445.7
  Top Layer w8.66: v1(4022.77,4219.57) U2.26@4022.8,4262.86 ; U1.3@4258.2,3987.29 v1(4258.21,4072.33)
  Bottom Layer w8.66: v1(4022.77,4219.57) cw(c4021.83,4218.63) 4023.17,4218.63 4023.17,4197.13 ccw(c4071.64,4197.13) 4037.37,4162.86 4117.26,4082.96 ccw(c4142.93,4108.62) 4142.93,4072.33 v1(4258.21,4072.33)
NRST: C22.2 R3.2 S1.2 U2.7 | length 1053
  Top Layer w10: U2.7@4101.54,4556.17 4101.48,4459.98 4101.48,4454.05 ccw(c4119.07,4454.05) 4106.63,4441.62 4116.98,4431.27 cw(c4116.31,4430.6) v2(4117.26,4430.6) ; S1.2@4683.98,4396.74 cw(c4635.02,4347.78) 4704.26,4347.78 R3.2@4704.26,4338.08 ; C22.2@4704.26,4294.93 ccw(c4706.72,4294.93) C22.2@4704.97,4293.2 v2(4704.27,4259.73) ; C22.2@4704.28,4294.93 R3.2@4704.28,4338.08
  Bottom Layer w10: v2(4117.26,4430.6) 4198.89,4430.6 ccw(c4198.89,4474.95) 4230.26,4443.59 4305.9,4519.23 4322.38,4535.72 cw(c4349.94,4508.16) 4349.94,4547.13 4426.32,4547.13 cw(c4426.32,4513.86) 4449.84,4537.39 4465.89,4521.34 4584.98,4402.25 ccw(c4608.74,4426.01) 4608.74,4392.41 4612.93,4392.41 cw(c4612.93,4347.73) 4644.52,4379.32 4690.88,4332.96 cw(c4658.57,4300.64) 4704.27,4300.64 v2(4704.27,4259.73)
OSC-I: U2.5 Y1.1 | length 119.5
  Top Layer w10: U2.5@4140.91,4556.17 4140.88,4591.62 cw(c4168.45,4591.62) 4148.96,4611.11 4162.54,4624.69 ccw(c4128.47,4658.77) Y1.1@4176.65,4658.77 ; Y1.1@4176.68,4658.76 Y1.1@4177.48,4653.42
OSC-O: U2.6 Y1.2 | length 115.7
  Top Layer w10: Y1.2@4084.65,4656.52 ccw(c4127.44,4656.52) 4097.18,4626.27 4113.68,4609.76 cw(c4095.54,4591.62) 4121.2,4591.62 U2.6@4121.22,4556.17 ; Y1.2@4084.68,4656.52 Y1.2@4085.48,4653.42
PWM1: P4.1 R4.1 U2.16 | length 269.8
  Top Layer w10: 3845.06,4477.12 ccw(c3852.4,4477.12) 3847.21,4471.93 3860.39,4458.75 ; 3846.22,4483 3864.1,4465.11 ccw(c3879.47,4480.48) 3879.47,4458.75 ; R4.1@3846.78,4511.7 3846.78,4491.15 cw(c3789,4491.15) P4.1@3829.86,4450.29 cw(c3850.31,4429.83) 3850.31,4458.75 U2.16@3964.68,4458.75